# EAGLE board extension_clk_adc (EAGLE 7.7.0)
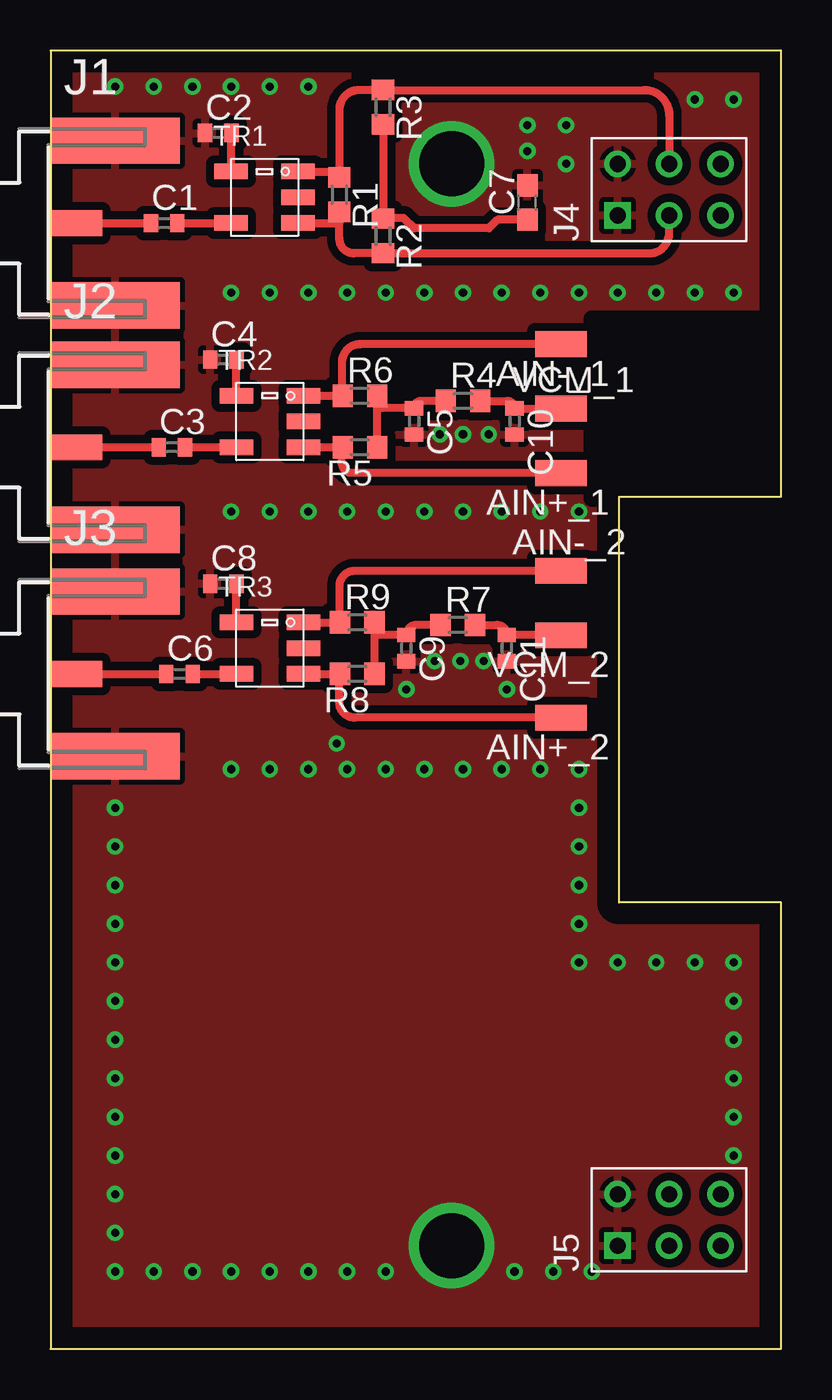
[diagram p0: board, top side]
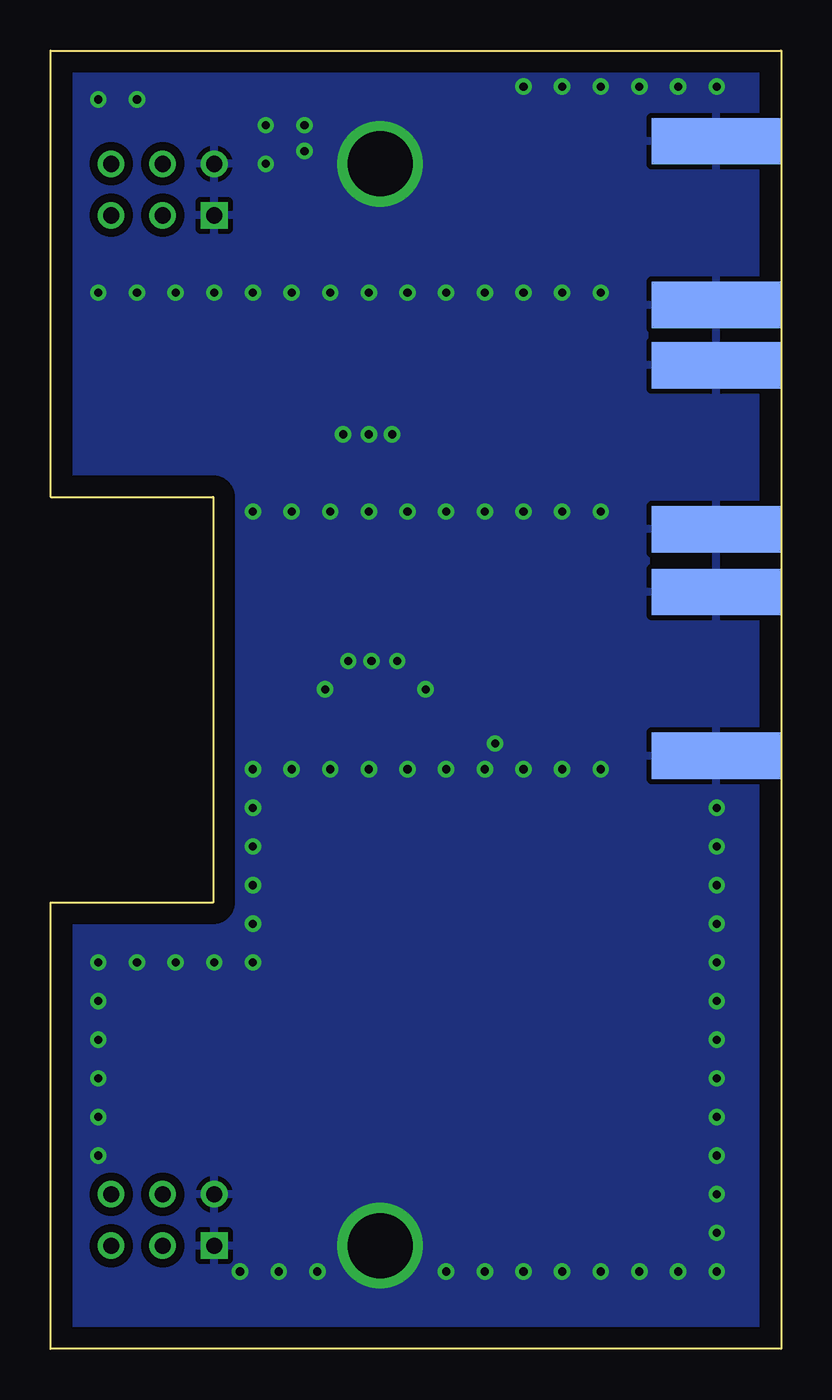
[diagram p1: board, bottom side, seen from below]

Size 36 x 64 mm. Coordinates in mm from the lower left corner, seen from the top.
Outline: 0,0 36,0 36,22 28,22 28,42 36,42 36,64 0,64 0,0
Copper layers (1*16): Top 0.035mm / dielectric 1.5mm / Bottom 0.035mm
Design rules "default": minimum track width 10mil, minimum drill 24mil, track to track 8mil, track to pad 8mil, pad to pad 8mil, via to via 8mil, smd to smd 8mil, copper to edge 40mil, drill to drill 8mil, minimum pad ring 10mil, minimum via ring 8mil, stop-mask expansion 4mil, vias tented up to drill 0mil, thermal gap 10mil
tRestrict: area 26.7,41.9 to 35.6,50.8

## Footprints (pad centres in the part's own frame; a part is rotated, then mirrored left to right if it is on the bottom)
SMD1,27-2,54 = smd 1.27 x 2.54: 1 0,0
C0402 = smd 0.7 x 0.9: 1 -0.65,0; 2 0.65,0
C0603 = smd 1.1 x 1: 1 -0.85,0; 2 0.85,0
SMA_BORD = smd 2.54 x 1.27: 1 1.27,0 | smd 6.35 x 2.286: G@1 3.175,4.064; G@2 3.175,-4.064 | smd 6.35 x 2.286 bottom: G@3 3.2,4.039; G@4 3.2,-4.039
DBL6 = drill 0.8 square: P$1 -1.27,2.54 | drill 0.8: P$2 1.27,2.54; P$3 -1.27,0; P$4 1.27,0; P$5 -1.27,-2.54; P$6 1.27,-2.54
R0603 = smd 1 x 1.1: 1 -0.85,0; 2 0.85,0
AT224-1A = smd 0.762 x 1.651: P$1 -1.27,1.651; P$2 0,1.651; P$3 1.27,1.651; P$4 1.27,-1.651; P$6 -1.27,-1.651

## Placement (x,y rotation side)
AIN+_1  [SMD1,27-2,54]  25.15,43.18 90 top
AIN+_2  [SMD1,27-2,54]  25.15,31.11 90 top
AIN-_1  [SMD1,27-2,54]  25.15,49.53 90 top
AIN-_2  [SMD1,27-2,54]  25.15,38.35 270 top
C1  100nF  [C0402]  5.59,55.5 0 top
C2  100nF  [C0402]  8.26,59.94 0 top
C3  100nF  [C0402]  5.97,44.45 0 top
C4  100nF  [C0402]  8.51,48.77 0 top
C5  100nF  [C0402]  17.91,45.72 270 top
C6  100nF  [C0402]  6.35,33.27 0 top
C7  100nF  [C0603]  23.5,56.52 90 top
C8  100nF  [C0402]  8.51,37.72 0 top
C9  100nF  [C0402]  17.53,34.54 270 top
C10  100nF  [C0402]  22.86,45.72 270 top
C11  100nF  [C0402]  22.48,34.54 270 top
J1  [SMA_BORD]  0,55.5 0 top
J2  [SMA_BORD]  0,44.45 0 top
J3  [SMA_BORD]  0,33.27 0 top
J4  DBL_6  [DBL6]  30.48,57.15 90 top
J5  DBL_6  [DBL6]  30.48,6.35 90 top
R1  100  [R0603]  14.22,56.9 270 top
R2  50  [R0603]  16.38,54.86 270 top
R3  50  [R0603]  16.38,61.21 270 top
R4  [R0603]  20.32,46.74 0 top
R5  25  [R0603]  15.24,44.45 180 top
R6  25  [R0603]  15.24,46.99 0 top
R7  [R0603]  20.07,35.69 0 top
R8  25  [R0603]  15.11,33.27 180 top
R9  25  [R0603]  15.11,35.81 0 top
TR1  TC1-1-13M  [AT224-1A]  10.54,56.77 270 top
TR2  TC1-1-13M  [AT224-1A]  10.79,45.72 270 top
TR3  TC1-1-13M  [AT224-1A]  10.79,34.54 270 top
VCM_1  [SMD1,27-2,54]  25.15,46.35 270 top
VCM_2  [SMD1,27-2,54]  25.15,35.18 90 top

## Library data of the parts
AIN+_1 AIN+_2 AIN-_1 AIN-_2 VCM_1 VCM_2 = wirepad
C1-C11 R1-R9 = rcl
J1-J5 = gil_connect
TR1-TR3 = gilloux_rf

## Nets
GND: C2.1 C4.1 C5.2 C7.2 C8.1 C9.2 C10.2 C11.2 J1.G@1 J1.G@2 J1.G@3 J1.G@4 J2.G@1 J2.G@2 J2.G@3 J2.G@4 J3.G@1 J3.G@2 J3.G@3 J3.G@4 J4.P$1 J4.P$2 J5.P$1 J5.P$2
N$1: C1.1 J1.1
N$2: C1.2 TR1.P$4
N$3: C2.2 TR1.P$6
N$4: J4.P$3 R1.2 R2.2 TR1.P$3
N$5: J4.P$4 R1.1 R3.1 TR1.P$1
N$6: C7.1 R2.1 R3.2
N$7: C3.1 J2.1
N$8: C3.2 TR2.P$4
N$9: C4.2 TR2.P$6
N$10: AIN+_1.1 R5.2 TR2.P$3
N$11: AIN-_1.1 R6.1 TR2.P$1
N$12: C5.1 R4.1 R5.1 R6.2
N$13: C6.1 J3.1
N$14: C6.2 TR3.P$4
N$15: C8.2 TR3.P$6
N$16: AIN+_2.1 R8.2 TR3.P$3
N$17: AIN-_2.1 R9.1 TR3.P$1
N$18: C9.1 R7.1 R8.1 R9.2
N$19: C10.1 R4.2 VCM_1.1
N$20: C11.1 R7.2 VCM_2.1

## Tracks (layer width: path | path; a pad name or v marks a point on that pad's centre or on a via)
GND  (via drill 0.4, 3.2)
  other vias: 14.1,29.84 22.48,32.51 20.19,33.91 21.34,33.91 17.53,32.51 18.92,33.91 21.59,45.09 19.18,45.09 20.32,45.09 33.66,52.07 31.75,52.07 29.84,52.07 27.94,52.07 26.04,52.07 24.13,52.07 22.23,52.07 20.32,52.07 18.41,52.07 16.51,52.07 14.61,52.07 12.7,52.07 10.79,52.07 8.89,52.07 8.89,41.27 10.79,41.27 12.7,41.27 14.61,41.27 16.51,41.27 18.41,41.27 20.32,41.27 22.23,41.27 24.13,41.27 26.04,41.27 8.89,28.57 10.79,28.57 12.7,28.57 14.61,28.57 16.51,28.57 18.41,28.57 20.32,28.57 22.23,28.57 24.13,28.57 26.04,28.57 8.89,62.23 10.79,62.23 12.7,62.23 23.5,60.33 25.4,60.33 25.4,58.42 23.5,59.05 31.75,61.59 33.66,61.59 19.76,58.42 19.76,5.08 6.99,62.23 5.08,62.23 3.17,62.23 3.17,26.67 3.17,24.77 3.17,22.86 3.17,20.95 3.17,19.05 3.17,17.14 3.17,15.24 3.17,13.34 3.17,11.43 3.17,9.53 3.17,7.62 3.17,5.71 3.17,3.81 5.08,3.81 6.99,3.81 8.89,3.81 10.79,3.81 12.7,3.81 14.61,3.81 16.51,3.81 26.04,26.67 26.04,24.77 26.04,22.86 26.04,20.95 26.04,19.05 27.94,19.05 29.84,19.05 31.75,19.05 33.66,19.05 33.66,17.14 33.66,15.24 33.66,13.34 33.66,11.43 33.66,9.53 22.86,3.81 24.77,3.81 26.67,3.81
  pour Top (isolate 0.406): 0,64.14 36.2,64.14 36.2,0 0,0
  pour Bottom (isolate 0.406): 0,64.14 35.56,64.14 35.56,0 0,0
N$1
  Top 0.406: J1.1 C1.1
N$2
  Top 0.406: C1.2 TR1.P$4
N$3
  Top 0.406: TR1.P$6 8.9,58.04 C2.2
N$4
  Top 0.406: J4.P$3 30.48,54.99 arc-90 29.5,54.01 R2.2 14.95,54.01 arc-90 14.22,54.74 14.22,55.5 | 14.22,55.5 R1.2 | TR1.P$3 14.22,55.5
N$5
  Top 0.406: J4.P$4 30.48,60.83 arc90 29.25,62.06 R3.1 15.2,62.06 arc90 14.22,61.09 R1.1 arc90 13.93,58.04 TR1.P$1
N$6
  Top 0.406: R3.2 R2.1 16.42,55.75 17.4,55.75 17.91,55.24 21.59,55.24 22.01,55.66 C7.1
N$7
  Top 0.406: J2.1 C3.1
N$8
  Top 0.406: C3.2 TR2.P$4
N$9
  Top 0.406: TR2.P$6 9.14,48.75 arc-90 C4.2
N$10
  Top 0.406: TR2.P$3 R5.2 arc90 14.35,44.41 14.35,43.69 arc90 14.86,43.18 AIN+_1.1
N$11
  Top 0.406: TR2.P$1 R6.1 arc-90 14.35,47.03 14.35,48.64 arc-90 15.24,49.53 AIN-_1.1
N$12
  Top 0.406: R5.1 16.09,46.23 | 16.09,46.23 R6.2 | 16.09,46.23 arc-90 16.23,46.37 C5.1 arc-90 18.27,46.74 R4.1
N$13
  Top 0.406: J3.1 C6.1
N$14
  Top 0.406: C6.2 TR3.P$4
N$15
  Top 0.406: TR3.P$6 9.14,37.7 arc-90 C8.2
N$16
  Top 0.406: TR3.P$3 R8.2 arc90 14.22,33.23 14.22,31.88 arc90 14.99,31.11 AIN+_2.1
N$17
  Top 0.406: TR3.P$1 R9.1 arc-90 14.22,35.85 14.22,37.59 arc-90 14.99,38.35 AIN-_2.1
N$18
  Top 0.406: R8.1 15.96,35.18 | 15.96,35.18 R9.2 | 15.96,35.18 arc-90 15.98,35.19 C9.1 arc-90 18.02,35.69 R7.1
N$19
  Top 0.406: R4.2 22.49,46.74 arc-90 C10.1 22.86,46.35 VCM_1.1
N$20
  Top 0.406: R7.2 21.99,35.69 arc-90 C11.1 arc90 22.49,35.18 VCM_2.1